# EAGLE board Proxmark3_dev (EAGLE 5.11)
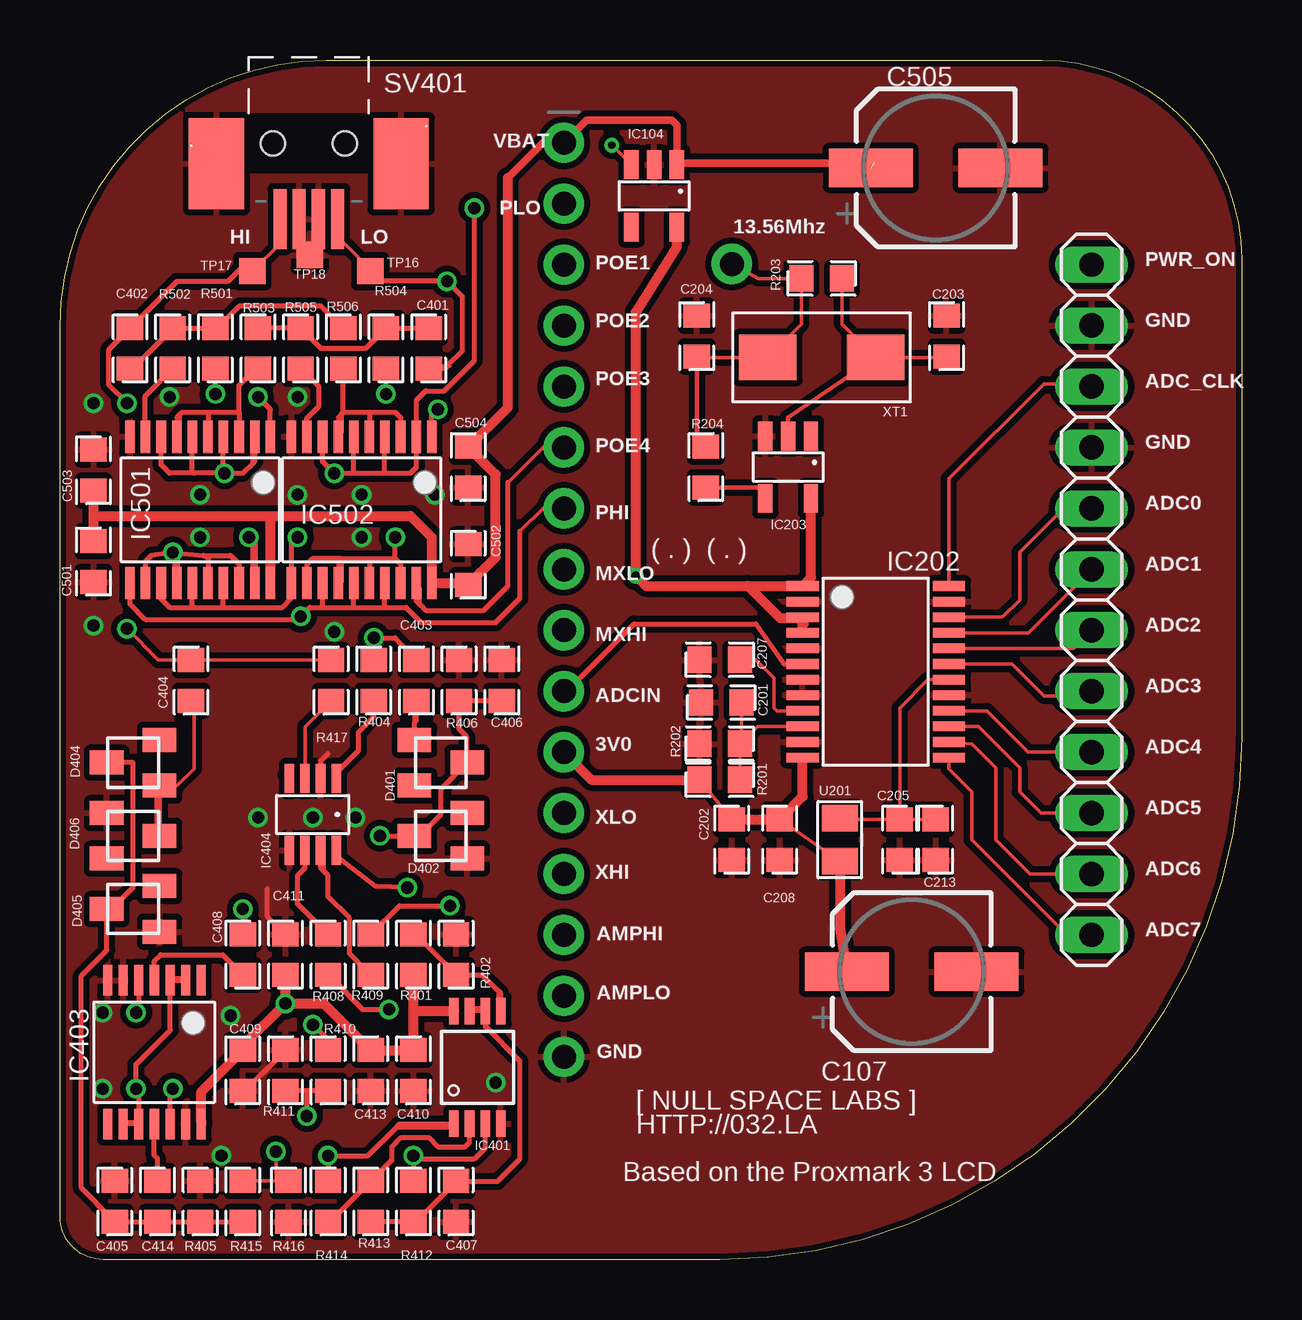
[diagram p0: board, top side]
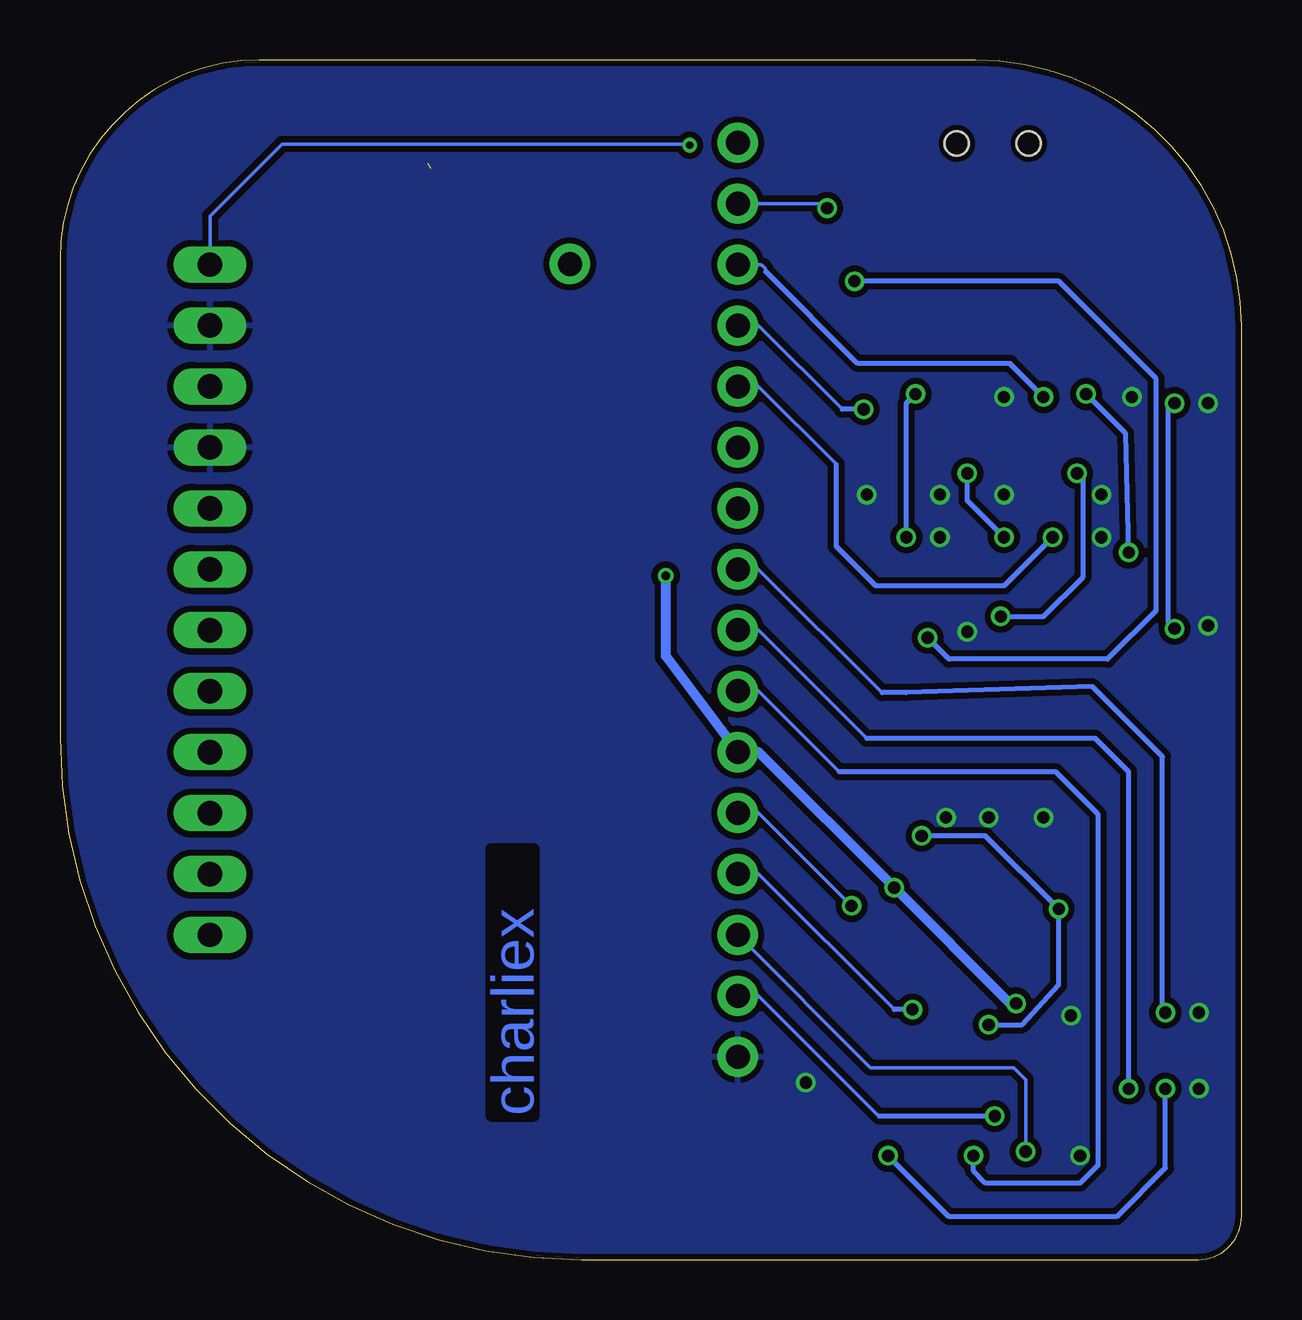
[diagram p1: board, bottom side, seen from below]

Size 49.25 x 50 mm. Coordinates in mm from the lower left corner, seen from the top.
Outline: 0,38.9 arc-90 11.1,50 40.94,50 arc-90 49.25,41.69 49.25,21.74 arc-90 27.51,0 1.8,0 arc-90 0,1.8 0,38.9
Copper layers (1*16): Top 0.035mm / dielectric 1.5mm / Bottom 0.035mm
Design rules "ITead_rule": minimum track width 6mil, minimum drill 12mil, track to track 6mil, track to pad 6mil, pad to pad 6mil, via to via 6mil, smd to smd 0mil, copper to edge 10mil, drill to drill 10mil, minimum pad ring 10mil, minimum via ring 6mil, stop-mask expansion 2mil, vias tented up to drill 100mil, thermal gap 10mil
Net classes: 1 power: width 0.305 mm

## Footprints (pad centres in the part's own frame; a part is rotated, then mirrored left to right if it is on the bottom)
153CLV-0605 = smd 3.5 x 1.6: + 2.7,0; - -2.7,0
0603 = smd 1 x 1.1: 1 -0.85,0; 2 0.85,0
SOT-23-3 = smd 1 x 1.4: 1 -0.95,-1.1; 2 0.95,-1.1; 3 0,1.1
SOT-23-5 = smd 0.6 x 1.2: 1 -0.95,-1.3; 2 0,-1.3; 3 0.95,-1.3; 4 0.95,1.3; 5 -0.95,1.3
TSSOP24 = smd 0.4 x 1.35: 1 -3.575,-3.05; 2 -2.925,-3.05; 3 -2.275,-3.05; 4 -1.625,-3.05; 5 -0.975,-3.05; 6 -0.325,-3.05; 7 0.325,-3.05; 8 0.975,-3.05; 9 1.625,-3.05; 10 2.275,-3.05; 11 2.925,-3.05; 12 3.575,-3.05; 13 3.575,3.05; 14 2.925,3.05; 15 2.275,3.05; 16 1.625,3.05; 17 0.975,3.05; 18 0.325,3.05; 19 -0.325,3.05; 20 -0.975,3.05; 21 -1.625,3.05; 22 -2.275,3.05; 23 -2.925,3.05; 24 -3.575,3.05
MSOP8 = smd 0.4 x 1.1: 1 -0.975,-2.35; 2 -0.325,-2.35; 3 0.325,-2.35; 4 0.975,-2.35; 5 0.975,2.35; 6 0.325,2.35; 7 -0.325,2.35; 8 -0.975,2.35
TSSOP14 = smd 0.381 x 1.27: 1 -1.95,-3; 2 -1.3,-3; 3 -0.65,-3; 4 0,-3; 5 0.65,-3; 6 1.3,-3; 7 1.95,-3; 8 1.95,3; 9 1.3,3; 10 0.65,3; 11 0,3; 12 -0.65,3; 13 -1.3,3; 14 -1.95,3
SOT-23-8 = smd 0.4 x 1.2: 1 -0.975,-1.5; 2 -0.325,-1.5; 3 0.325,-1.5; 4 0.975,-1.5; 5 0.975,1.5; 6 0.325,1.5; 7 -0.325,1.5; 8 -0.975,1.5
TSSOP20 = smd 0.4 x 1.35: 1 -2.925,-3.05; 2 -2.275,-3.05; 3 -1.625,-3.05; 4 -0.975,-3.05; 5 -0.325,-3.05; 6 0.325,-3.05; 7 0.975,-3.05; 8 1.625,-3.05; 9 2.275,-3.05; 10 2.925,-3.05; 11 2.925,3.05; 12 2.275,3.05; 13 1.625,3.05; 14 0.975,3.05; 15 0.325,3.05; 16 -0.325,3.05; 17 -0.975,3.05; 18 -1.625,3.05; 19 -2.275,3.05; 20 -2.925,3.05
1X12 = drill 1.016 long: 1 -13.97,0; 2 -11.43,0; 3 -8.89,0; 4 -6.35,0; 5 -3.81,0; 6 -1.27,0; 7 1.27,0; 8 3.81,0; 9 6.35,0; 10 8.89,0; 11 11.43,0; 12 13.97,0
1X01_ROUND = drill 1 pad 1.676 round: 1 0,0
1X16_ROUND = drill 1 pad 1.676 round: 1 -19.05,0; 2 -16.51,0; 3 -13.97,0; 4 -11.43,0; 5 -8.89,0; 6 -6.35,0; 7 -3.81,0; 8 -1.27,0; 9 1.27,0; 10 3.81,0; 11 6.35,0; 12 8.89,0; 13 11.43,0; 14 13.97,0; 15 16.51,0; 16 19.05,0
HIROSE-MQ172 = smd 0.55 x 2.5: 1 -1.2,6.75; 2 -0.4,6.75; 3 0.4,6.75; 4 1.2,6.75 | smd 2.3 x 3.8: M1 3.85,4.45; M2 -3.85,4.45 | hole 1: 1.5,3.6; -1.5,3.6
TP06SQ = smd 1.1 x 1.1: TP 0,0
0805 = smd 1.1 x 1.5: 1 -0.9,0; 2 0.9,0
6035 = smd 2.4 x 1.9: 1 -2.25,0; 2 2.25,0

## Placement (x,y rotation side)
C107  100u  [153CLV-0605]  35.5,12 180 top
C201  DNP  [0603]  27.56,23.22 180 top
C202  1u  [0603]  28,17.5 270 top
C203  22p  [0603]  36.96,38.49 90 top
C204  22p  [0603]  26.54,38.49 90 top
C205  1u  [0603]  35,17.5 270 top
C207  100n  [0603]  27.5,25 180 top
C208  100n  [0603]  30,17.5 270 top
C213  100n  [0603]  36.5,17.5 270 top
C401  1n  [0603]  15.37,37.98 90 top
C402  47p  [0603]  2.92,37.98 270 top
C403  0R  [0603]  14.86,24.14 270 top
C404  22p  [0603]  5.46,24.14 270 top
C405  130p  [0603]  2.29,2.42 90 top
C406  1n  [0603]  18.41,24.14 90 top
C407  1u  [0603]  16.51,2.42 270 top
C408  1n  [0603]  7.62,12.71 270 top
C409  100n  [0603]  7.62,7.88 270 top
C410  100n  [0603]  14.73,7.88 270 top
C411  100n  [0603]  9.4,12.71 90 top
C413  4u7  [0603]  12.95,7.88 270 top
C414  1n  [0603]  4.06,2.42 90 top
C501  100n  [0603]  1.4,29.09 270 top
C502  100n  [0603]  17.02,28.96 90 top
C503  4u7  [0603]  1.4,32.9 90 top
C504  4u7  [0603]  17.02,33.03 270 top
C505  100u  [153CLV-0605]  36.5,45.5 180 top
D401  BAS21  [SOT-23-3]  15.88,20.71 270 top
D402  BZX84C47  [SOT-23-3]  15.88,17.66 90 top
D404  BAR18  [SOT-23-3]  3.05,20.71 90 top
D405  BZX84C47  [SOT-23-3]  3.05,14.61 90 top
D406  BAR18  [SOT-23-3]  3.05,17.66 270 top
IC104  MCP1824T-300  [SOT-23-5]  24.77,44.33 180 top
IC202  ADC08060  [TSSOP24]  34,24.5 270 top
IC203  7404  [SOT-23-5]  30.35,33.03 180 top
IC401  AD8052  [MSOP8]  17.4,8.01 0 top
IC403  CD4066  [TSSOP14]  3.94,8.64 180 top
IC404  TLV3502  [SOT-23-8]  10.54,18.55 180 top
IC501  74AC244  [TSSOP20]  5.84,31.25 180 top
IC502  74AC244  [TSSOP20]  12.57,31.25 180 top
JP1  [1X12]  43,27.5 90 top
JP2  [1X01_ROUND]  28,41.5 0 top
JP3  [1X16_ROUND]  21,27.5 270 top
R201  DNP  [0603]  27.5,20 180 top
R202  0R  [0603]  27.5,21.5 0 top
R203  1M  [0603]  31.75,40.89 180 top
R204  100R  [0603]  26.92,33.03 90 top
R401  100K  [0603]  14.73,12.71 270 top
R402  100K  [0603]  16.51,12.71 270 top
R404  240K  [0603]  13.08,24.14 270 top
R405  10k  [0603]  5.84,2.42 90 top
R406  510K  [0603]  16.64,24.14 90 top
R408  1K  [0603]  11.18,12.71 90 top
R409  1K  [0603]  12.95,12.71 270 top
R410  10M  [0603]  11.18,7.88 270 top
R411  240K  [0603]  9.4,7.88 270 top
R412  100K  [0603]  14.73,2.42 90 top
R413  10K  [0603]  12.95,2.42 90 top
R414  10K  [0603]  11.18,2.42 90 top
R415  10M  [0603]  7.62,2.42 90 top
R416  1M  [0603]  9.53,2.42 90 top
R417  240K  [0603]  11.3,24.14 270 top
R501  33R  [0603]  6.48,37.98 90 top
R502  10K  [0603]  4.7,37.98 90 top
R503  33R  [0603]  8.26,37.98 90 top
R504  33R  [0603]  13.59,37.98 90 top
R505  10K  [0603]  10.03,37.98 90 top
R506  33R  [0603]  11.81,37.98 90 top
SV401  HIROSE  [HIROSE-MQ172]  10.37,50.12 180 top
TP16  TPTP06SQ  [TP06SQ]  12.93,41.2 0 top
TP17  TPTP06SQ  [TP06SQ]  8.02,41.2 0 top
TP18  TPTP06SQ  [TP06SQ]  10.41,41.87 0 top
U201  FB  [0805]  32.5,17.5 270 top
XT1  13.56MHz  [6035]  31.75,37.6 180 top

## Library data of the parts
C107 C201-C205 C207 C208 C213 C401-C411 C413 C414 C501-C505 D401 D402 D404-D406 IC104 IC202 IC203 IC401 IC403 IC404 IC501 IC502 R201-R204 R401 R402 R404-R406 R408-R417 R501-R506 SV401 TP16-TP18 U201 XT1 = proxmark
JP1 = adafruit
JP2 JP3 = microbuilder

## Nets
13.56MHZ: C204.1 JP2.1 R203.2 R204.2 XT1.2
+3V0: C107.+ C202.1 C208.1 C409.1 C410.1 C411.1 C413.1 IC104.5 IC202.1 IC202.3 IC202.4 IC202.12 IC203.5 IC401.8 IC403.14 IC404.8 JP3.11 R201.2 R401.2 U201.2
+VBAT [power]: C501.1 C502.1 C503.1 C504.1 C505.+ IC104.1 IC501.20 IC502.20 JP3.1
+VBIAS: C407.1 IC401.6 IC401.7 R412.1 R413.1
ADC0: IC202.22 JP1.8
ADC1: IC202.21 JP1.7
ADC2: IC202.20 JP1.6
ADC3: IC202.19 JP1.5
ADC4: IC202.16 JP1.4
ADC5: IC202.15 JP1.3
ADC6: IC202.14 JP1.2
ADC7: IC202.13 JP1.1
ADC_CLK: IC202.24 JP1.10
ADC_IN: IC202.6 IC401.1 JP3.10 R414.2
ADCDR_HI: C405.1 C414.1 D404.3 D405.3 R405.1 R415.1
ADCDR_LO: C406.1 C408.1 D401.3 D402.3 R406.1 R410.1
AMP_HI_REAL: JP3.14 R415.2 R416.2
AMP_LO: JP3.15 R410.2 R411.2
ANT_HI_DRV: C402.2 R501.2 R502.2 R506.2
ANT_LO_DRV: C401.2 R503.2 R504.2 R505.2
CROSS_HI: JP3.13 R408.1
CROSS_LO: JP3.12 R409.1
GND: C107.- C201.2 C202.2 C203.2 C204.2 C205.2 C207.2 C208.2 C213.2 C405.2 C406.2 C407.2 C409.2 C410.2 C411.2 C413.2 C501.2 C502.2 C503.2 C504.2 C505.- D402.1 D405.1 D406.1 IC104.2 IC202.2 IC202.5 IC202.7 IC202.8 IC202.11 IC202.17 IC202.23 IC203.3 IC401.4 IC403.6 IC403.7 IC403.13 IC404.2 IC404.5 IC501.10 IC502.10 JP1.9 JP1.11 JP3.16 R202.1 R402.1 R405.2 R406.2 R411.1 R416.1 SV401.2 SV401.3 SV401.M1 SV401.M2 TP18.TP
MUX_HI: IC403.12 JP3.9
MUX_LO: IC403.5 JP3.8
N$1: C207.1 IC202.9
N$3: IC203.4 R204.1
N$4: C203.1 IC203.2 R203.1 XT1.1
N$9: C201.1 IC202.10 R201.1 R202.2
N$14: IC401.5 R401.1 R402.2
N$16: C414.2 IC403.11
N$17: C401.1 C403.1 R404.1 SV401.1 TP16.TP
N$20: C404.2 D404.1 D406.3
N$23: IC404.1 R404.2
N$24: IC404.7 R409.2
N$25: IC401.3 IC403.2 IC403.3 IC403.9 IC403.10 R412.2
N$28: IC404.6 R408.2
N$29: IC404.3 R417.2
N$30: C403.2 D401.1
N$32: C408.2 IC403.4
N$33: IC501.12 IC501.14 IC501.16 IC501.18 R501.1
N$34: IC502.12 IC502.14 IC502.16 IC502.18 R504.1
N$40: IC404.4
N$41: IC501.3 IC501.5 IC501.7 R503.1
N$42: IC502.3 IC502.5 IC502.7 R506.1
N$43: C402.1 C404.1 R417.1 SV401.4 TP17.TP
N$44: IC501.9 R502.1
N$45: IC502.9 R505.1
N$52: IC401.2 R413.2 R414.1
PWR_HI: IC501.2 IC501.4 IC501.6 IC501.8 IC501.11 IC502.13 IC502.15 IC502.17 JP3.7
PWR_LO: IC501.13 IC501.15 IC501.17 IC502.2 IC502.4 IC502.6 IC502.8 IC502.11 JP3.2
PWR_OE1: IC501.1 JP3.3
PWR_OE2: IC502.1 JP3.4
PWR_OE3: IC501.19 JP3.5
PWR_OE4: IC502.19 JP3.6
PWR_ON: IC104.3 JP1.12
VDD: C205.1 C213.1 IC202.18 U201.1

## Tracks (layer width: path | path; a pad name or v marks a point on that pad's centre or on a via)
13.56MHZ
  Top 0.152: C204.1 26.58,37.6 XT1.2 30.9,39 R203.2 29.11,40.89 JP2.1
  Top 0.178: R204.2 26.54,33.88 C204.1
+3V0  (via drill 0.36, 0.51)
  Top 0.152: v14.48,15.5 14.49,15.51 | 31,26.5 31,26.18 | C409.1 7.75,8.75 C409.1 | 5.89,5.75 6,5.75 IC403.14 | C411.1 9.5,12 C411.1 | C413.1 13,8.75 C413.1 | C410.1 14.75,8.75 C410.1 | IC401.8 16.5,10.5 16.43,10.37 | IC404.8 11.5,17 11.51,17 | R201.2 C202.1 | C208.1 U201.2
  Top 0.203: 11.51,17.05 11.51,17 11.51,16.82 13.16,15.55 v14.48,15.5
  Top 0.406: IC403.14 5.89,5.75 5.89,6.99 C409.1 7.62,8.9 v9.4,10.68 | 14.73,10.29 C410.1 C413.1 11,10.68 v9.4,10.68 | 14.73,10.29 R401.2 | 16.43,10.37 14.81,10.37 14.73,10.29 | v9.4,10.68 C411.1 | IC104.5 25.71,42.22 24,39.5 v24,28.5 24.43,28.07 28.68,28.07 | U201.2 32.5,13.8 C107.+ | IC203.5 31.3,28.43 IC202.1 28.68,28.07 | IC202.3 IC202.4 31,26.18 | 31,26.5 30.75,26.75 30,26.75 28.68,28.07 | C202.1 C208.1 30.95,19.3 IC202.12 | R201.2 22.15,20 JP3.11
  Bottom 0.406: v9.4,10.68 9.65,10.68 v14.48,15.5 20.13,21.15 JP3.11 24,25.15 v24,28.5
+VBAT  (1 unrouted)
  Top 0.305: 14.61,31 8.89,31 arc90 8.76,30.87 | C501.1 1.5,30 1.4,30 | 1.4,32 1.5,32 C503.1 | C502.1 17,28.25 16.94,28.2 | C504.1 17,34 17.02,33.87 | IC501.20 8.75,28.25 8.76,28.25 | IC502.20 15.5,28.25 15.49,28.25 | 18.67,45.09 20.13,46.55 JP3.1 21.95,47.5 25.5,47.5 25.71,47.28 IC104.1 25.78,45.7 33.92,45.7
  Top 0.406: 1.4,29.93 C501.1 1.4,30 1.4,31 | 1.4,31 1.4,32 C503.1 1.4,32.06 | 18.67,45.09 18.67,35.52 17.02,33.87 18.16,32.72 18.16,29.27 17.02,28.13 16.94,28.2 IC502.20 15.49,28.25 15.49,30.11 14.61,31 1.4,31 | 8.76,30.87 8.76,28.25 IC501.20
+VBIAS
  Top 0.152: IC401.7 17.25,10.5 17.75,10.5 IC401.6 17.75,10.25 17.73,10.25 | R413.1 13,1.5 13,1.58 | 16.5,3.25 | 16.5,3.25 C407.1 | R412.1 14.75,1.5 14.75,1.58
  Top 0.203: 17.07,10.37 17.73,10.37 17.73,10.25 17.73,9.71 19.18,8.26 19.18,4.2 18.24,3.26 16.51,3.26 16.5,3.25 14.83,1.58 14.75,1.58 13,1.58 12.95,1.58
ADC0
  Top 0.152: IC202.22 39.27,26.77 40,27.5 40,29.5 42,31.5 42.81,31.5 JP1.8
ADC1
  Top 0.152: IC202.21 40.35,26.12 JP1.7
ADC2
  Top 0.152: IC202.20 42.24,25.48 JP1.6
ADC3
  Top 0.152: IC202.19 39.67,24.82 41,23.5 42.81,23.5 JP1.5
ADC4
  Top 0.152: IC202.16 38.62,22.88 40.35,21.15 JP1.4
ADC5
  Top 0.152: IC202.15 38.27,22.23 40,20.5 40,19.5 40.89,18.61 JP1.3
ADC6
  Top 0.152: IC202.14 38,21.5 39,20.5 39,17.5 40.43,16.07 JP1.2
ADC7
  Top 0.152: IC202.13 37.05,20.45 38,19.5 38,17.5 42,13.5 42.97,13.5 JP1.1
ADC_CLK
  Top 0.152: IC202.24 37.05,32.55 41,36.5 42.89,36.5 JP1.10
ADC_IN  (via drill 0.51)
  Top 0.152: R414.2 11.25,3.25 11.18,3.26 | 14,5.5 16.25,5.5 IC401.1 | 21.32,23.88 21.13,23.69 JP3.10
  Top 0.203: 11.18,3.26 R414.2 v11.18,4.33 12.83,4.33 14,5.5 14.15,5.65 16.43,5.65 | 21.32,23.88 23.94,26.5 29,26.5 30.18,24.82 IC202.6
  Bottom 0.152: 16.76,20.33 20.13,23.69 JP3.10
  Bottom 0.203: v11.18,4.33 11.18,3.69 10.67,3.18 6.73,3.18 5.97,3.95 5.97,18.55 7.75,20.33 16.76,20.33
ADCDR_HI
  Top 0.152: 2.29,1.58 C405.1 C414.1 | R415.1 R405.1 5.75,1.5 5.75,1.58 | C405.1 2.25,1.75 2.18,1.68 | D405.3 2,14.5 1.96,14.5 | D404.3 2,20.75 2,20.71
  Top 0.203: D404.3 2,20.71 3.05,20.71 3.05,15.5 2.16,14.61 D405.3 1.96,14.5 1.96,12.89 0.89,11.82 0.89,2.98 2.18,1.68 2.29,1.58 5.75,1.58 7.62,1.58
ADCDR_LO  (via drill 0.51)
  Top 0.152: R410.1 11.25,8.75 11.18,8.75 | 14.75,17.66 14.75,17.75 D402.3 | C408.1 7.75,13.75 7.75,14.5 v7.62,14.61 | R406.1 16.75,23.25 16.75,23.3 | C406.1 18.5,23.25 C406.1 | D401.3 17,20.75 16.97,20.71
  Top 0.203: v13.34,17.66 14.75,17.66 D402.3 14.99,17.66 15.88,18.55 15.88,19.62 16.97,20.71 | C406.1 16.75,23.3 R406.1 16.64,22.11 16.97,21.78 16.97,20.71 | 16.97,20.71 17.02,20.76 16.84,20.76 | v7.62,14.61 C408.1 7.62,13.55 | R410.1 11.18,8.75 11.18,9.15 v10.54,9.79
  Bottom 0.203: v13.34,17.66 10.67,17.66 v7.62,14.61 7.62,11.44 9.14,9.79 v10.54,9.79
AMP_HI_REAL  (via drill 0.51)
  Top 0.152: R416.2 9,3.27 | 9,3.27 R415.2 | 9,3.27 v9,4.5
  Bottom 0.152: JP3.14 15.47,8 9.5,8 9,7.5 v9,4.5
AMP_LO  (via drill 0.51)
  Top 0.152: R411.2 9.5,7 9.5,7.04 | 11,7.04 11,7 R410.2
  Top 0.203: 9.4,7.04 9.5,7.04 10.29,7.04 | 10.29,7.04 11,7.04 11.18,7.04 | 10.29,7.04 v10.29,5.98
  Bottom 0.152: 15.11,5.98 20.13,10.99 JP3.15
  Bottom 0.203: v10.29,5.98 15.11,5.98
ANT_HI_DRV
  Top 0.152: C402.2 3,37.25 3.06,37.19 | 4.69,38.81 4.75,38.75 R502.2 | R501.2 6.5,38.75 6.5,38.82 | R506.2 11.75,39 11.69,38.94
  Top 0.203: R506.2 11.69,38.94 10.87,39.76 7.49,39.76 6.55,38.82 6.5,38.82 R502.2 4.69,38.81 3.06,37.19 3.02,37.14 2.92,37.14
ANT_LO_DRV
  Top 0.152: R503.2 8.25,38.75 R503.2 | 10,38.82 10,38.75 R505.2 | R504.2 13.75,38.75 13.75,38.82 | C401.2 15.25,38.75 15.25,38.82
  Top 0.203: R503.2 10,38.82 R505.2 10.87,37.98 12.75,37.98 R504.2 13.75,38.82 15.25,38.82 C401.2
CROSS_HI  (via drill 0.51)
  Top 0.152: R408.1 11.25,11.75 11.27,11.77
  Top 0.203: R408.1 11.27,11.77 12.62,10.42 v13.72,10.42
  Bottom 0.152: 14.48,10.42 20.13,16.07 JP3.13
  Bottom 0.203: v13.72,10.42 14.48,10.42
CROSS_LO  (via drill 0.51)
  Top 0.152: R409.1 13,13.5 12.95,13.55
  Top 0.203: v16.26,14.74 14.15,14.74 12.95,13.55
  Bottom 0.152: v16.26,14.74 20.13,18.61 JP3.12
GND  (via drill 0.51)
  Top 0.152: IC202.2 30.88,27.5 | 9.21,8.54 9.25,8.5 R411.1 | 7.72,7.04 7.75,7 C409.2 | 7.19,45 SV401.M1 | TP18.TP 9.97,42.31 SV401.3
  Top 0.203: 7.62,7.04 7.72,7.04 9.21,8.54 R411.1 | IC404.2 10.87,20.79 11.18,21.09 | 8.64,15.45 8.64,14.31 9.4,13.55
  other vias: 9.91,31.88 12.57,30.11 10.54,18.42 1.4,26.42 1.4,35.7 9.91,35.95 4.57,35.95 5.84,31.88 12.57,31.88 5.84,30.11 15.62,31.88 1.78,7.12 1.78,10.29 6.73,4.33 7.11,10.17 18.16,7.37 12.32,18.42 8.26,18.42 11.43,26.17
  pour Top (isolate 0.254): -0.5,50.84 0,-0.5 50.08,-0.5 50.08,37.6 50.04,41.64 50.04,51.57 48.77,51.34
  pour Bottom (isolate 0.254): 0,-0.5 50.33,-0.5 50.58,40.14 50.33,51.39 49.83,51.48 -1,51.48
MUX_HI  (via drill 0.51)
  Top 0.152: IC403.12 4.5,5.75 4.6,5.75
  Top 0.203: IC403.12 4.6,5.75 4.6,7.02 v4.7,7.12
  Bottom 0.152: 15.62,21.73 20.13,26.23 JP3.9
  Bottom 0.203: v4.7,7.12 4.7,20.33 6.1,21.73 15.62,21.73
MUX_LO  (via drill 0.51)
  Top 0.152: IC403.5 3.25,11.5 3.28,11.5
  Top 0.203: 3.28,11.64 3.28,11.5 3.28,10.4 v3.17,10.29
  Bottom 0.152: 14.99,23.63 20.13,28.77 JP3.8
  Bottom 0.203: 14.99,23.63 13.97,23.63 6.22,23.88 3.3,20.96 3.3,10.42 v3.17,10.29
N$1
  Top 0.152: IC202.9 29.88,22.88 29.75,23 29.75,24.25 29,25 C207.1
N$3
  Top 0.178: R204.1 29.4,32.18 IC203.4
N$4
  Top 0.152: R203.1 32.6,39 XT1.1 36.92,37.6 C203.1
  Top 0.178: IC203.2 30.35,35.1 XT1.1
N$9
  Top 0.152: R201.1 R202.2 28.41,21.56 | 28.41,21.56 C201.1 | 28.41,21.56 29.07,22.23 IC202.10
N$14
  Top 0.152: R402.2 16.5,12 16.44,11.94 | 14.81,13.55 14.75,13.5 R401.1 | IC401.5 18.25,10.5 18.25,11.25 18.24,11.24
  Top 0.203: 18.36,10.17 18.36,11.11 18.24,11.24 17.6,11.87 R402.2 16.44,11.94 14.81,13.55 14.73,13.55
N$16
  Top 0.152: 4.06,3.5 4,3.5 C414.2 | 3.94,5.5 4,5.5 IC403.11
  Top 0.203: IC403.11 3.94,5.5 3.94,4.33 4.06,4.2 4.06,3.5 C414.2 4.06,3.26
N$17  (via drill 0.51)
  Top 0.152: R404.1 13,25 R404.1 | 14.82,25.07 14.75,25 C403.1 | C401.1 15.5,37.25 16.25,37.25 16.2,37.3 | 12.93,41.28 11.57,42.64 SV401.1
  Top 0.203: 15.37,37.14 16.05,37.14 16.2,37.3 16.76,37.85 16.76,40.14 v16.13,40.77 13.44,40.77 12.93,41.28 TP16.TP | 14.86,24.98 C403.1 14.86,25.03 14.82,25.07 13.97,25.92 v13.08,25.92 R404.1 13.08,24.98
  Bottom 0.203: v16.13,40.77 7.62,40.77 3.56,36.71 3.56,27.06 5.59,25.03 12.19,25.03 v13.08,25.92
N$20
  Top 0.152: 4.31,19.94 4.25,20 D404.1 | D406.3 4,17.75 4,19.75 D404.1 | C404.2 5.59,23.29 5.59,20.45 4.89,19.76 D404.1
  Top 0.203: 4.31,19.94 D404.1 D406.3
N$23
  Top 0.152: R404.2 13,23.25 13.08,23.25 | 11.51,20.28 11.5,20.25 IC404.1
  Top 0.203: 11.51,20.05 11.51,20.28 12.45,21.22 12.45,21.98 13.08,22.61 13.08,23.25 R404.2
N$24
  Top 0.152: R409.2 12.75,12 12.79,12.04 | 10.97,16.22 11,16.25 11,17 IC404.7
  Top 0.203: IC404.7 10.87,16.32 10.97,16.22 11.18,16.01 11.18,15.12 12.06,14.23 12.06,12.76 12.79,12.04 R409.2
N$25  (via drill 0.51)
  Top 0.152: R412.2 14.75,3.25 14.73,3.26 | 3.28,5.75 3.25,5.75 | IC401.3 17.75,5.5 17.73,5.5 | 3.25,5.75 2.75,5.75 IC403.9 | 3.25,5.75 IC403.10 | 4.6,11.5 4.5,11.5 IC403.3 4.75,11.75 5.25,11.75 IC403.2
  Top 0.203: IC403.9 3.28,5.65 3.28,5.75 3.28,7.02 v3.17,7.12 3.17,8.14 4.6,9.56 4.6,11.5 IC403.3 IC403.2 | 17.73,5.65 17.73,5.5 17.73,4.66 17.27,4.2 14.86,4.2 v14.73,4.33 R412.2 14.73,3.26
  Bottom 0.203: v14.73,4.33 12.19,1.79 5.21,1.79 3.17,3.82 v3.17,7.12
N$28
  Top 0.152: R408.2 11,13.75 10.99,13.74 | 10.21,17 10.25,17 IC404.6
  Top 0.203: IC404.6 10.21,17 10.21,16.32 9.91,16.01 9.91,14.82 10.99,13.74 11.18,13.55
N$29
  Top 0.152: IC404.3 10.22,22.2 R417.2
N$30
  Top 0.152: 14.78,21.75 14.75,21.75 D401.1 | C403.2 14.75,23.25 14.75,22.5 14.78,22.41
  Top 0.203: D401.1 14.78,21.75 14.78,22.41 14.86,22.49 C403.2
N$32
  Top 0.152: C408.2 7.5,12 7.5,11.99 | 3.94,11.75 4,11.75 IC403.4
  Top 0.203: IC403.4 3.94,11.75 3.94,12.45 4.19,12.71 6.78,12.71 7.5,11.99 C408.2
N$33  (via drill 0.51)
  Top 0.152: R501.1 6.5,37 6.48,37 | 6.17,28.25 6.25,28.25 IC501.16 | IC501.12 3.5,28.25 3.56,28.25 | IC501.14 4.75,28.25 4.75,29.25 v4.7,29.47 | IC501.18 7.5,28.25 7.47,28.25
  Top 0.203: v6.48,36.08 6.48,37 R501.1 6.48,37.14 | v4.7,29.47 3.81,29.34 3.56,29.09 3.56,28.25 3.56,28.2 | v4.7,29.47 5.97,29.34 | 5.97,29.34 7.11,29.34 7.47,28.99 7.47,28.25 IC501.18 | IC501.14 4.88,29.29 v4.7,29.47 | IC501.16 6.17,28.25 6.17,29.27 5.97,29.34
  Bottom 0.203: v6.48,36.08 4.83,34.42 v4.7,29.47
N$34  (via drill 0.51)
  Top 0.152: R504.1 13.5,37 13.59,37 | 12.9,28.25 13,28.25 IC502.16 | IC502.12 10.25,28.25 10.29,28.25 | IC502.14 11.75,28.25 11.75,29.22 11.75,29.25 | IC502.18 14.25,28.25 14.2,28.25
  Top 0.203: 13.97,29.22 v13.97,30.11 | v13.59,36.08 13.59,37 R504.1 13.59,37.14 | 11.56,29.22 10.54,29.22 10.29,28.96 10.29,28.25 10.29,28.2 | 11.56,29.22 11.75,29.22 12.95,29.22 | 12.95,29.22 13.97,29.22 | IC502.18 14.2,28.25 14.2,28.99 13.97,29.22 | IC502.16 12.9,28.25 12.9,29.17 12.95,29.22 | IC502.14 11.61,29.17 11.56,29.22
  Bottom 0.203: v13.97,30.11 13.97,35.7 v13.59,36.08
N$40
  Top 0.152: IC404.4 9.4,20.22
N$41
  Top 0.152: R503.1 8,37.5 7.75,37.5 8.02,36.98 | 7.47,34.5 7.5,34.5 IC501.3 | IC501.7 5,34.5 5,35.25 5.01,35.24 | IC501.5 6.25,34.25 IC501.5
  Top 0.203: 8.26,37.14 8.18,37.14 8.02,36.98 7.47,36.43 7.47,35.31 | 6.22,35.31 5.08,35.31 5.01,35.24 4.88,35.11 IC501.7 | 6.22,35.31 7.47,35.31 | IC501.5 6.17,35.26 6.22,35.31 | 7.47,35.31 7.47,34.5 IC501.3
N$42
  Top 0.152: R506.1 11.75,37 11.81,37 | 12.9,34.5 13,34.5 IC502.5 | IC502.7 11.75,34.5 11.75,35.25 | IC502.3 14.25,34.25 IC502.3
  Top 0.203: IC502.7 11.61,35.11 11.75,35.25 11.81,35.31 | 11.81,35.31 12.83,35.31 | 12.83,35.31 13.97,35.31 14.2,35.09 IC502.3 | IC502.5 12.9,34.5 12.9,35.24 12.83,35.31 | 11.81,35.31 11.81,37 R506.1 11.81,37.14
N$43  (via drill 0.51)
  Top 0.152: 11.29,24.96 11.25,25 R417.1 C404.1 4.1,24.99 v2.79,26.3 | C402.1 3,39 3.05,38.95 | TP17.TP 9.17,42.35 SV401.4
  Top 0.203: C402.1 2.87,38.82 | v2.79,35.7 2.03,36.46 2.03,37.93 C402.1 | C402.1 3.05,38.95 4.88,40.77 7.01,40.77 7.52,41.28 TP17.TP | 11.29,24.96 11.3,24.98
  Bottom 0.203: v2.79,35.7 3.05,35.44 3.05,26.55 v2.79,26.3
N$44
  Top 0.152: R502.1 4.5,37 4.53,36.97 | 3.56,34.5 3.5,34.5 IC501.9
  Top 0.203: 3.56,34.3 3.56,34.5 3.56,36 4.53,36.97 4.7,37.14
N$45
  Top 0.152: R505.1 10.25,37 10.21,36.96 | 10.29,34.5 10.25,34.5 IC502.9
  Top 0.203: 10.03,37.12 R505.1 10.03,37.14 10.21,36.96 10.79,36.38 10.79,35.57 10.29,35.06 10.29,34.5 10.29,34.3
N$52
  Top 0.152: R414.1 11.25,1.5 11.25,1.58 | 12.95,3.26 13,3.25 R413.2 | IC401.2 17,5.5 17.07,5.5
  Top 0.203: 11.18,1.58 11.25,1.58 12.95,3.26 13.84,4.15 13.84,4.71 14.22,5.09 15.37,5.09 15.75,4.71 16.89,4.71 17.07,4.88 17.07,5.5 17.07,5.65
PWR_HI  (via drill 0.51)
  Top 0.152: IC501.11 3,28.25 IC501.11 | 10.24,27.01 10.25,27 v10.03,26.8 | IC501.8 4.25,34.25 4.22,34.25 | IC502.13 11,28.25 IC502.13 | IC502.15 12.25,28.25 IC502.15 | IC501.6 5.5,34.25 5.51,34.25 | IC501.4 6.75,34.25 6.81,34.25 | IC502.17 13.5,28.25 13.54,28.2 | IC501.2 8,34.25 8,33.25 8.05,33.2 | 19.18,30.36 20.13,31.31 JP3.7
  Top 0.203: v6.86,32.77 7.62,32.77 8.05,33.2 8.13,33.28 IC501.2 | v6.86,32.77 5.59,32.77 | 5.59,32.77 4.57,32.77 4.22,33.13 4.22,34.25 IC501.8 | IC501.11 2.92,27.31 3.56,26.68 9.91,26.68 v10.03,26.8 10.24,27.01 10.41,27.19 10.92,27.19 | 6.81,34.3 6.81,34.25 6.81,32.83 v6.86,32.77 | IC501.6 5.51,34.25 5.51,32.85 5.59,32.77 | 10.92,27.19 12.19,27.19 | IC502.15 12.24,27.24 12.19,27.19 | IC502.13 10.95,27.21 10.92,27.19 | 19.18,30.36 19.18,27.57 18.16,26.55 15.06,26.55 14.43,27.19 13.46,27.19 | 12.19,27.19 13.46,27.19 | 13.54,28.2 13.54,27.26 13.46,27.19
  Bottom 0.203: v10.03,26.8 8.26,26.8 6.6,28.46 6.6,32.52 v6.86,32.77
PWR_LO  (via drill 0.51)
  Top 0.152: IC502.2 14.86,33.5 | IC502.11 9.65,28 | IC501.13 4.25,28.25 IC501.13 | 5.51,28 5.5,28 IC501.15 | IC501.17 6.75,28.25 6.81,28.2 | IC502.8 11,34.25 10.95,34.25 | IC502.6 12.25,34.25 12.24,34.25 | IC502.4 13.5,34.25 13.54,34.25
  Top 0.203: 5.59,27.19 4.57,27.19 4.22,27.54 IC501.13 | 5.59,27.19 6.86,27.19 | 6.86,27.19 9.27,27.19 9.65,27.57 9.65,28 9.65,29.85 v9.91,30.11 | 6.81,28.2 6.81,27.24 6.86,27.19 | IC501.15 5.51,28 5.51,27.26 5.59,27.19 | 12.19,32.77 13.59,32.77 | 13.59,32.77 14.61,32.77 14.86,33.03 14.86,33.5 14.86,35.82 15.24,36.2 16,36.2 17.27,37.47 v17.27,43.82 | IC502.6 12.24,34.25 12.24,32.83 12.19,32.77 | 13.54,34.3 13.54,34.25 13.54,32.83 13.59,32.77 | 12.19,32.77 v11.43,32.77 10.95,33.26 10.95,34.25 IC502.8
  Bottom 0.152: v17.27,43.82 17.46,44.01 JP3.2
  Bottom 0.203: v9.91,30.11 11.43,31.63 v11.43,32.77
PWR_OE1  (via drill 0.51)
  Top 0.152: IC501.1 8.75,34.25 IC501.1
  Top 0.203: IC501.1 8.76,35.44 v8.26,35.95
  Bottom 0.152: JP3.3 20.13,41.47 arc90 19.83,41.17
  Bottom 0.203: v8.26,35.95 9.65,37.35 16,37.35 19.83,41.17
PWR_OE2  (via drill 0.51)
  Top 0.152: IC502.1 15.5,34.25 IC502.1
  Top 0.203: IC502.1 15.49,35.19 v15.75,35.44
  Bottom 0.152: 16.64,35.44 20.13,38.93 JP3.4
  Bottom 0.203: v15.75,35.44 16.64,35.44
PWR_OE3  (via drill 0.51)
  Top 0.152: IC501.19 8,28.25 8,30 v7.87,30.11
  Top 0.203: IC501.19 8.13,29.85 v7.87,30.11
  Bottom 0.152: 16.89,33.16 20.13,36.39 JP3.5
  Bottom 0.203: v7.87,30.11 9.91,28.07 15.24,28.07 16.89,29.73 16.89,33.16
PWR_OE4
  Top 0.152: IC502.19 15,28 15,27.25 15.02,27.27 | 18.67,32.39 20.13,33.85 JP3.6
  Top 0.203: 18.67,32.39 18.67,28.07 17.65,27.06 15.24,27.06 15.02,27.27 14.86,27.44 IC502.19
PWR_ON  (via drill 0.3)
  Top 0.152: IC104.3 v23,46.45
  Bottom 0.152: JP1.12 43,43.5 40,46.5 23,46.5 v23,46.45
VDD
  Top 0.152: C205.1 C213.1 | C205.1 32.05,18.35 U201.1 | IC202.18 36.17,24.18 35,23 C205.1

## Text on the board
Bottom: charliex
tPlace: VBAT | PLO | HI | LO | 13.56Mhz | POE1 | PWR_ON | POE2 | GND | POE3 | ADC_CLK | POE4 | GND | ADC0 | PHI | ( . ) ( . ) | MXLO | ADC1 | ADC2 | MXHI | ADCIN | ADC3 | 3V0 | ADC4 | XLO | ADC5 | ADC6 | XHI | AMPHI | ADC7 | AMPLO | GND | [ NULL SPACE LABS ] | HTTP://032.LA | Based on the Proxmark 3 LCD